# Altium PCB RepCounterPCB.PcbDoc
Units mil, origin at the board's own origin, x right, y up, seen from the top; angles counter-clockwise.
Board outline 3030 x 3255 mil, 2 copper layers (Top Layer, Bottom Layer); 23 components, 30 nets, 89 pads, 0 vias.
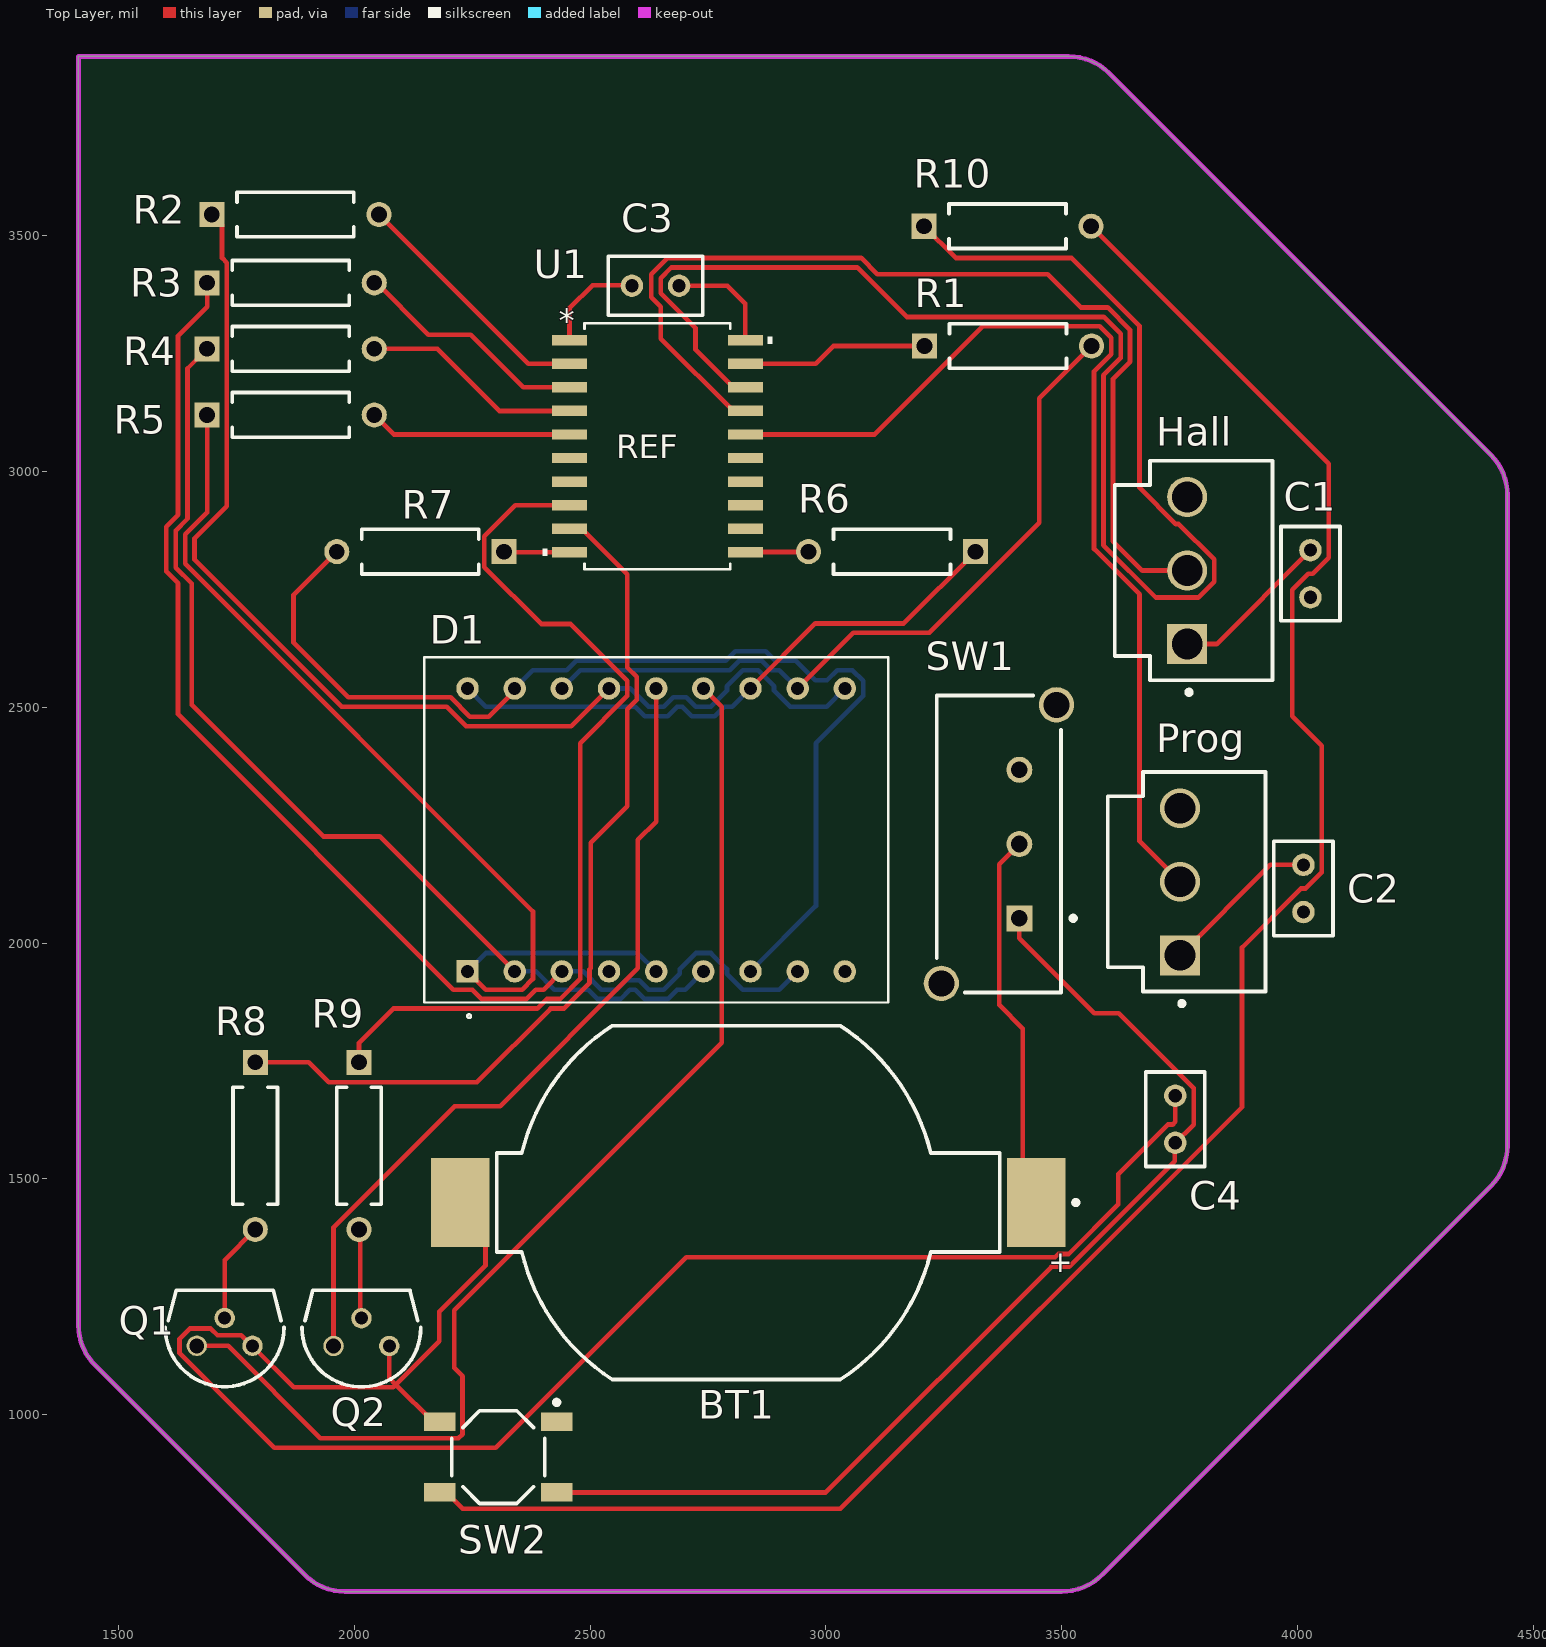
[diagram p0: Top Layer view]
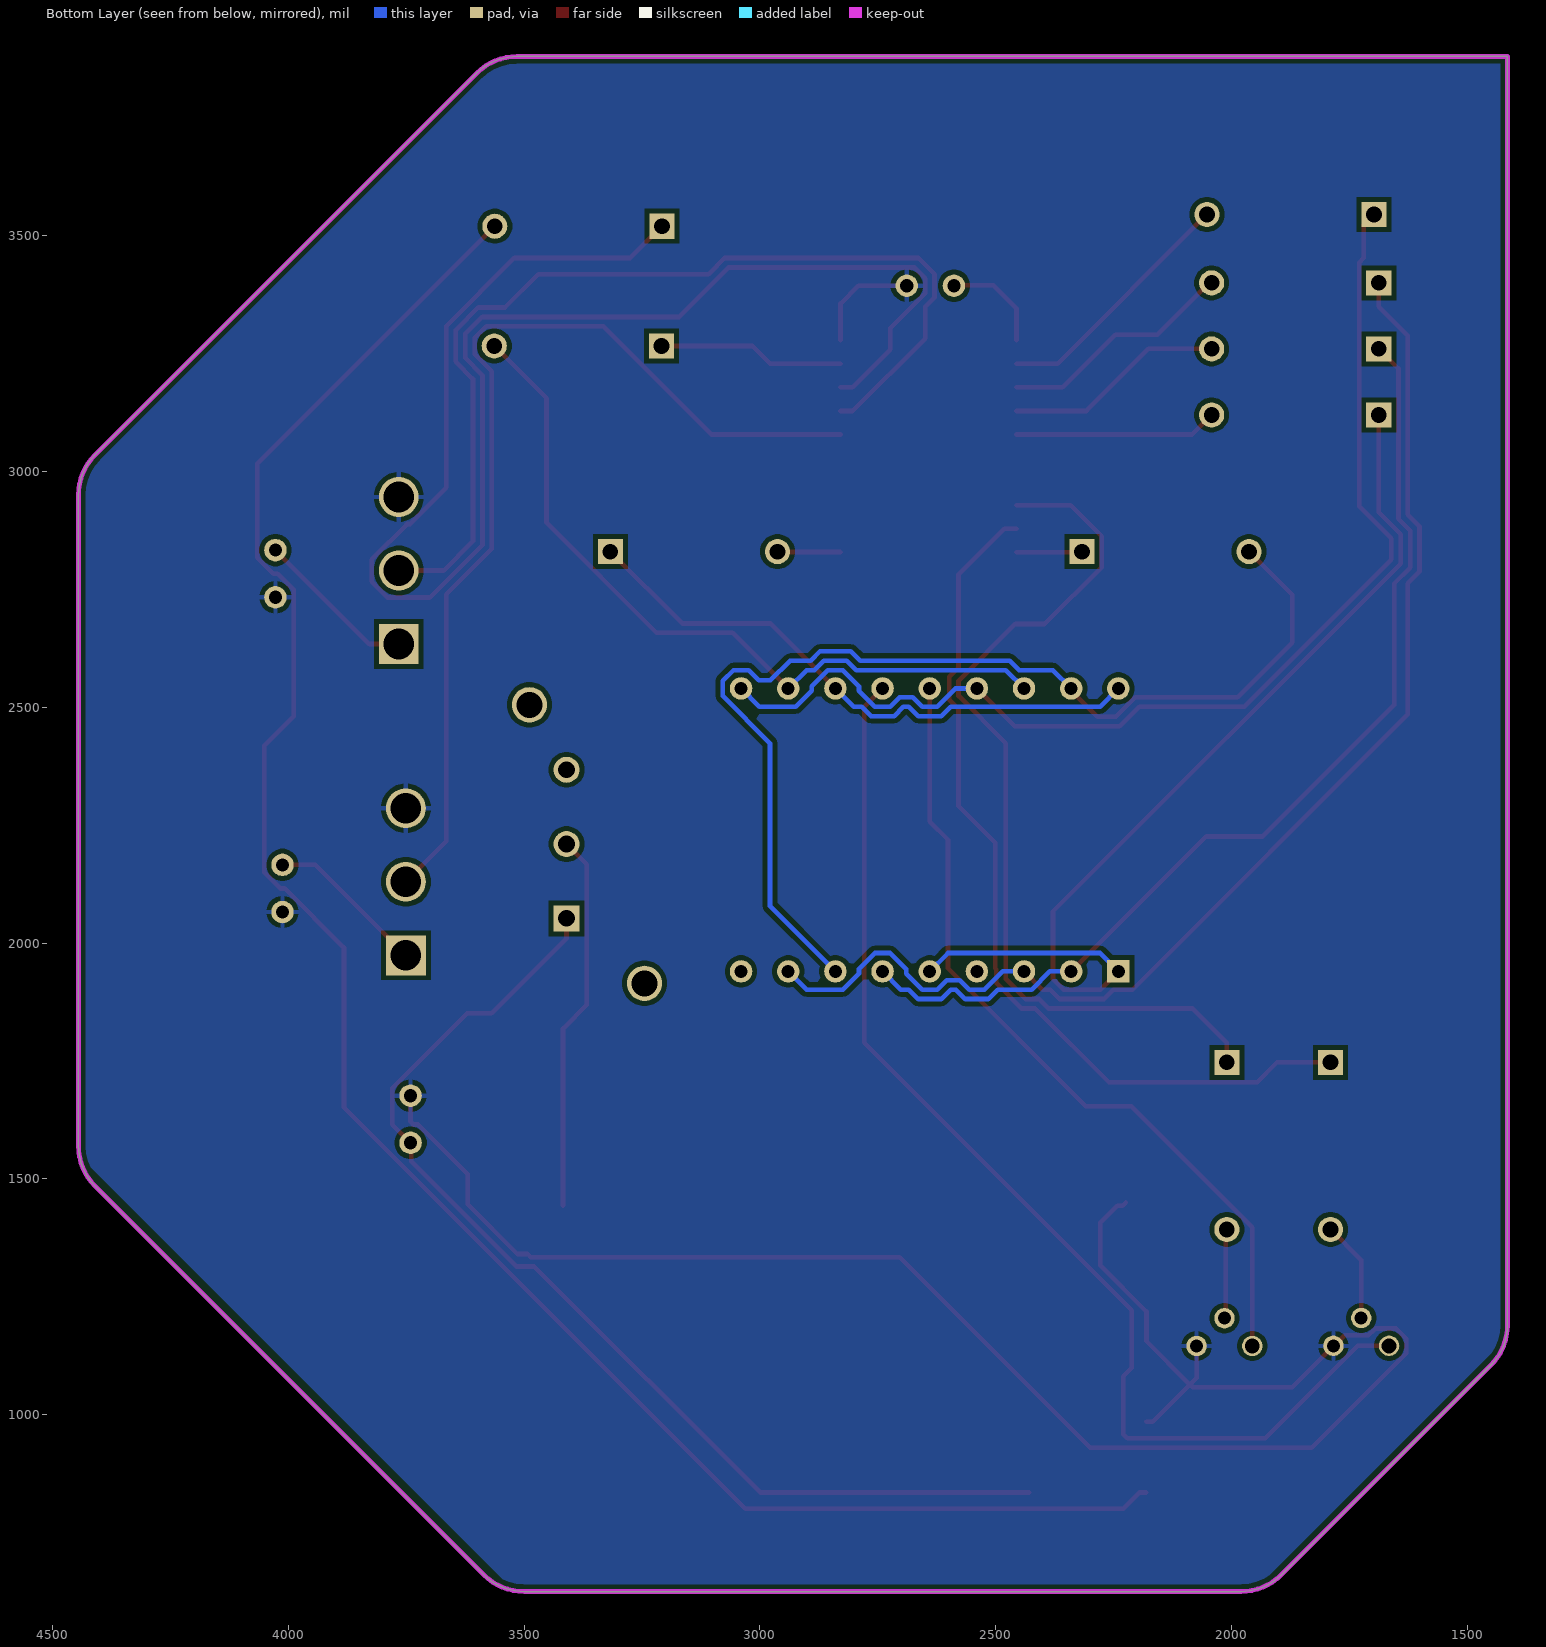
[diagram p1: Bottom Layer view, seen from below]

## Layer stack, top to bottom
Top Solder: solder mask 0.4, Solder Resist, Dk 3.5
Top Layer: signal copper 1.4
Dielectric 1: dielectric 12.6, FR-4, Dk 4.8
Bottom Layer: signal copper 1.4
Bottom Solder: solder mask 0.4, Solder Resist, Dk 3.5

## Board outline
1450.36,1104.64 1894.64,660.36 ccw(c1980,745.71) 1980,625 3500,625 ccw(c3500,745.71) 3585.36,660.36 4409.64,1484.64 ccw(c4324.29,1570) 4445,1570 4445,2950 ccw(c4324.29,2950) 4409.64,3035.36 3600.36,3844.64 ccw(c3515,3759.29) 3515,3880 1415,3880 1415,1190 ccw(c1535.71,1190)

## Design rules (kind name [scope] priority, off if disabled: settings)
Clearance [All] p1: gap=10 ignorepadtopadclearanceinfootprint=FALSE
PolygonConnect [All] p1: connectstyle=Relief reliefconductorwidth=10 reliefentries=4 polygonreliefangle="90 Angle" airgapwidth=10
RoutingVias [All] p1: holewidth=28 width=50 viastyle="Through Hole" minholewidth=28 minwidth=50 maxholewidth=28 maxwidth=50
SolderMaskExpansion [All] p1: expansion=4 istentingtop=FALSE
SupplyNets "Schematic Supply Nets" [InNet('GND')] p1: voltage=0.000
Width [All] p1: maxlimit=10 minlimit=10 preferedwidth=10
30 further rules are at their usual default settings.

## Components (designator, comment, footprint, x,y, rotation, side; value= is the part's Value field where it differs from the comment)
BT1 "796136-1" TECO-796136-1_V 2835.16,1449.82 r180 top
C1 "C320C104M5U5TA" C320C 4302.95,2507.62 r270 top
C2 "C320C104M5U5TA" C320C 4287.95,1840.21 r270 top
C3 "C320C104M5U5TA" C320C 2914.16,3669.47 r0 top
C4 "C320C104M5U5TA" C320C 4016.39,1350.88 r270 top
D1 "HDSP-523G" LED_HDSP-523G 2640,2240 r90 top
Hall "B3P-VH(LF)(SN)" JST-B3P-VH(LF)(SN)-3_V 3815,2790 r90 top
Prog "B3P-VH(LF)(SN)" JST-B3P-VH(LF)(SN)-3_V 3800,2130 r90 top (schematic designator Programmer)
Q1 "PN2222ABU" FAIR-TO-92 1725,1185.32 r180 top
Q2 "PN2222ABU" FAIR-TO-92 2015,1185 r180 top
R1 "MFR-25FBF52-475R" RESA60-630X240 3386.17,3266.16 r0 top value=475
R2 "MFR-25FBF52-475R" RESA60-630X240 1875,3545 r0 top value=475
R3 "MFR-25FBF52-475R" RESA60-630X240 1865,3400 r0 top value=475
R4 "MFR-25FBF52-475R" RESA60-630X240 1865,3260 r0 top value=475
R5 "MFR-25FBF52-475R" RESA60-630X240 1865,3120 r0 top value=475
R6 "MFR-25FBF52-475R" RESA60-630X240 3140,2830 r180 top value=475
R7 "MFR-25FBF52-475R" RESA60-630X240 2140,2830 r180 top value=475
R8 "MFR-25FBF52-1K" RESA60-630X240 1790,1570 r270 top value=1k
R9 "MFR-25FBF52-1K" RESA60-630X240 2010,1570 r270 top value=1k
R10 "MFR-25FBF52-475R" RESA60-630X240 3385,3520 r0 top value=475
SW1 "1825255-1" TECO-1825255-1_V 3366.69,2210 r90 top
SW2 "TL3342F160QG" ESWI-TL3342F160QG_V 2305,910 r270 top
U1 "ATTINY1616-SN" SOIC20_300MIL_MCH 2642.55,3053.44 r0 top

## Footprints (in the part's own frame and the unit in brackets; to place one, negate y for a bottom-side part, rotate by r counter-clockwise, add the part's x,y. Pads: shape width x height; smd on the part's side, far side on the other; paste and mask are expansions set on the pad)
C320C [mm]
  round 1.21 hole 0.71: 1(-8.27,-7) 2(-5.73,-7)
  silkscreen extent -9.54,-8.59 -4.46,-5.41, body extent -2.54,-1.59 2.54,1.59, height 6.34
ESWI-TL3342F160QG_V [mm] "SMD, 4-Leads, Body 5x5mm, Pitch 6.3mm"
  rect 1x1.7 smd: 1(-1.9,3.15) 2(-1.9,-3.15) 3(1.9,3.15) 4(1.9,-3.15)
  silkscreen extent -3.07,-2.5 2.5,3.28, body extent -2.5,-2.5 2.5,2.5, height 1.5
FAIR-TO-92 [mm] "TO, 3-Leads, Body Dia 4.79mm, Pitch 1.27mm"
  round 1.1 hole 0.7 paste-2539.97 mask+0.08: 1(-1.5,1)
  round 1.1 hole 0.7 mask+0.08: 2(0,-0.5)
  round 1.1 hole 0.8 mask+0.08: 3(1.5,1)
  silkscreen extent -3.2,-2 3.2,3.2, body extent -2.38,-2 2.38,2.5, height 0.25
JST-B3P-VH(LF)(SN)-3_V [mm] "Connector, 3-Leads, Body 8.5x11.82mm, Pitch 3.96mm"
  rect 2.15x2.15 hole 1.65: 1(-3.96,1.25)
  round 2.15 hole 1.65: 2(0,1.25) 3(3.96,1.25)
  silkscreen extent -6.68,-3.35 5.91,5.15, body extent -5.91,-3.35 5.91,5.15, height 10.9
LED_HDSP-523G [mm]
  rect 1.208x1.208 / inner round 1.208 / far side rect 1.208x1.208 hole 0.7: 1(-7.62,10.16)
  round 1.208 hole 0.7: 2(-7.62,7.62) 3(-7.62,5.08) 4(-7.62,2.54) 5(-7.62,0) 6(-7.62,-2.54) 7(-7.62,-5.08) 8(-7.62,-7.62) 9(-7.62,-10.16) 10(7.62,-10.16) 11(7.62,-7.62) 12(7.62,-5.08) 13(7.62,-2.54) 14(7.62,0) 15(7.62,2.54) 16(7.62,5.08) 17(7.62,7.62) 18(7.62,10.16)
  silkscreen extent -10.13,-12.5 9.3,12.5, body extent -9.3,-12.5 9.3,12.5, height 8
RESA60-630X240 [mm] "Axial Resistor, 2-Leads, Dia 2.4mm, Body Length 6.3mm"
  rect 1.35x1.35 hole 0.85: 1(-4.5,0)
  round 1.35 hole 0.85: 2(4.5,0)
  silkscreen extent -3.15,-1.2 3.15,1.2, body extent -4.77,-1.19 4.77,1.2, height 2.4
SOIC20_300MIL_MCH [mil]
  rect 74x22 smd paste+0 mask+0: 1(-186.5,225) 2(-186.5,175) 3(-186.5,125) 4(-186.5,75) 5(-186.5,25) 6(-186.5,-25) 7(-186.5,-75) 8(-186.5,-125) 9(-186.5,-175) 10(-186.5,-225) 11(186.5,-225) 12(186.5,-175) 13(186.5,-125) 14(186.5,-75) 15(186.5,-25) 16(186.5,25) 17(186.5,75) 18(186.5,125) 19(186.5,175) 20(186.5,225)
  silkscreen extent -244,-261 244,261, body extent -209,-256 209,256, height 104
TECO-796136-1_V [mm] "SMD, 2-Leads, Body 32.31x19.05mm"
  rect 3.15x4.78 smd: 1(-15.52,0) 2(15.52,0)
  silkscreen extent -17.77,-9.52 13.54,9.53, body extent -16.15,-9.52 16.17,9.53, height 6.52
TECO-1825255-1_V [mm] "THD, 5-Leads, Body 6.7x16mm, Pitch 4mm"
  rect 1.4x1.4 hole 0.9: 1(-4,-1.1)
  round 1.4 hole 0.9: 2(0,-1.1) 3(4,-1.1)
  round 1.9 hole 1.4: MH1(-7.5,3.1) MH2(7.5,-3.1)
  silkscreen extent -8,-4.13 8,3.35, body extent -8,-3.35 8,3.35, height 12

## Part data
BT1: library part CMP-002-00002-2, "Battery Connector, 1 Cell, CR2032, 2-Pin SMD, RoHS, Tape and Reel", Colour=Black, Manufacturer="TE Connectivity", Max Voltage Rating (AC)=30V, Package Description="2-Pin Surface Mount Device, Body 32.31 x 19.05 mm", Package Quantity=400, Batteries=1, Case/Package=796136-1, Connector Type=BatteryHolder, Contact Material=Bronze, Contact Plating=Tin, Datasheet URL=http://www.te.com/commerce/DocumentDelivery/DDEController?Action=srchrtrv&DocNm=796136&DocType=Customer+Drawing&DocLang=English&DocFormat=pdf&PartCntxt=796136-1, Datasheet Version=Dec-13, Manufacturer URL=http://www.te.com/, Mounting Technology=SM, Package Reference=796136-1, Packaging=TapeandReel, Pins=2, RoHS Compliant=True
C1 C2 C3 C4: "C320 C 100nF Ceramic Multilayer Capacitor, 50 VDC, +85degC, Z5U Dielec, +/-20%", Package="Radial KEMET", Check_prices=https://www.snapeda.com/parts/C320C104M5U5TA/KEMET/view-part/?ref=eda, MF=KEMET, MP=C320C104M5U5TA, SnapEDA_Link=https://www.snapeda.com/parts/C320C104M5U5TA/KEMET/view-part/?ref=snap
D1: "Displays Segmented Panel 2DIGIT 16LED Green CC 18-Pin DIP Tube", Package=None, Check_prices=https://www.snapeda.com/parts/HDSP-523G/Avago/view-part/?ref=eda, MF="Avago Technologies", MP=HDSP-523G, SnapEDA_Link=https://www.snapeda.com/parts/HDSP-523G/Avago/view-part/?ref=snap
Hall Prog: library part CMP-002-00026-2, "Male Header, Pitch 3.96 mm, 1 x 3 Position, Height 10.9 mm, Tail Length 3.7 mm, -25 to 85 degC, RoHS, Bulk", Manufacturer=JST, Max Operating Temperature=85°C, Min Operating Temperature=-25°C, Package Description="Male Header, Pitch 3.96 mm, 1 x 3 Position, Height 10.9 mm, Tail Length 3.7 mm", Case/Package=B3P-VH(LF)(SN), Connector Type=Header, Datasheet URL=http://www.jst-mfg.com/product/pdf/eng/eVH.pdf, Datasheet Version=May-16, Gender=Male, Manufacturer URL=http://www.jst.com/home2.html, Mounting Technology=TH, Package Reference=B3P-VH(LF)(SN), RoHS Compliant=Unknown
Q1 Q2: library part CMP-013-00009-7, "NPN General-Purpose Amplifier, 40 V, -55 to 150 degC, 3-Pin TO-92, RoHS, Bulk", Case/Package=TO-226-3, Frequency=300MHz, Manufacturer=Fairchild, Max Operating Temperature=150°C, Min Operating Temperature=-55°C, Package Description="3-Pin Transistor Outline Package, Body Dia 4.79 mm, Pitch 1.27 mm", Package Quantity=1000, Package Reference=TO-92, Power=625mW, Datasheet URL=https://www.fairchildsemi.com/datasheets/PN/PN2222A.pdf, Datasheet Version="Rev. 1.1.0, 07/2014", Elements=1, hFE Min=100, Mounting Technology=TH, Packaging=Bulk, Pins=3, RoHS Compliant=True, Vce Max=1V
R1 R2 R3 R4 R5 R6 R7 R10: library part CMP-009-00056-4, "Axial Resistor, 475 Ohm, +/- 1%, 0.25 W, -55 to 155 degC, 2-Pin THD, RoHS, Bulk", Case/Package=Axial, Manufacturer=Yageo, Max Operating Temperature=155°C, Min Operating Temperature=-55°C, Package Description="2-Pin Axial Lead, Dia 2.4 mm, Body Length 6.3 mm", Package Quantity=200, Package Reference=MFR-25, Power=250mW, Tolerance=1%, Voltage Rating=250V, Datasheet URL=http://www.yageo.com/documents/recent/Yageo%20LR_MFR_2013.pdf, Datasheet Version=Apr-13, Manufacturer URL=http://www.yageo.com/, Mounting Technology=TH, Packaging=Bulk, RoHS Compliant=True
R8 R9: library part CMP-009-00048-4, "Axial Resistor, 1 KOhm, +/- 1%, 250 mW, -55 to 155 degC, 2-Pin THD, RoHS, Bulk", Case/Package=Axial, Manufacturer=Yageo, Max Operating Temperature=155°C, Min Operating Temperature=-55°C, Package Description="2-Pin Axial Lead, Dia 2.4 mm, Body Length 6.3 mm", Package Quantity=200, Package Reference=MFR-25, Power=250mW, Tolerance=1%, Voltage Rating=250V, Composition=CarbonFilm, Datasheet URL=http://www.yageo.com/documents/recent/Yageo%20LR_MFR_2013.pdf, Datasheet Version=Apr-13, Manufacturer URL=http://www.yageo.com/, Mounting Technology=TH, Packaging=Bulk, RoHS Compliant=True
SW1: library part CMP-011-00001-2, "Slide Switch, SPDT, 0.3A, 125 V, -20 to 85 degC, 5-Pin THD, RoHS, Tray", Current Rating=300mA, Manufacturer="TE Connectivity", Max Contact Resistance=30mohm, Max Operating Temperature=85°C, Max Voltage Rating (AC)=125V, Min Operating Temperature=-20°C, Operating Force=600gf, Package Description="5-Pin Through Hole Device, Body 6.7 x 16 mm, Pitch 4 mm", Package Quantity=560, Case/Package=1825255-1, Contact Finish=Silver, Contact Material=Copper, Contact Plating=Silver, Datasheet URL=http://www.te.com/commerce/DocumentDelivery/DDEController?Action=showdoc&DocId=Customer+Drawing%7F1825255%7FA4%7Fpdf%7FEnglish%7FENG_CD_1825255_A4_baseFilename.pdf%7F1825255-1, Datasheet Version="Rev. A4, 03/2014", Manufacturer URL=http://www.te.com/, Max Current Rating=300mA, Mounting Technology=TH, Package Reference=1825255-1, Packaging=Bulk, RoHS Compliant=True, Throw Configuration=SPDT, Voltage Rating (AC)=125V
SW2: library part CMP-011-00008-2, "Tactile Switch, SPST-NO, 50 mA, 12 V, 4-Pin SMD, RoHS, Tape and Reel", Current Rating=50mA, Manufacturer=E-Switch, Max Voltage Rating (DC)=12V, Operating Force=1.6N, Package Description="4-Pin Surface Mount Device, Body 5 x 5 mm, Pitch 6.3 mm", Package Quantity=3000, Case/Package=TL3342F160QG, Contact Material=Silver, Contact Plating=Silver, Datasheet URL=http://spec_sheets.e-switch.com/specs/P010632.pdf, Datasheet Version="Rev. I, 12/2010", Manufacturer URL=http://www.e-switch.ch/en/, Mounting Technology=SM, Package Reference=TL3342F160QG, Packaging=TapeandReel, RoHS Compliant=True, Throw Configuration=SPST, Voltage Rating (DC)=12V
U1: "Description", Manufacturer_Name=Microchip, Copyright="Copyright (C) 2025 Ultra Librarian. All rights reserved.", Manufacturer_Part_Number=ATTINY1616-SN, RefDes=RefDes, Type=Type

## Nets (pads, with @x,y where several pads share a name; then routed paths per layer and width w, separated by ;. In a path a pad name is that pad's centre, name@x,y a point inside that pad or via, vN(x,y) a via of type N, cw(c..) or ccw(c..) an arc to the next point about the centre after c; other vN are vias at no path point)
GND: BT1.2 C1.2 C2.2 C3.2 C4.1 Hall.3 Prog.3 Q1.1 Q2.1 SW2.2 U1.20 | length 4066.4
  Top Layer w10: Q1.1@1784.06,1145.53 1871.63,1057.95 2082.34,1057.95 2088.2,1063.81 ; Q1.1 1782.09,1145.94 1759.69,1168.35 1709.82,1168.35 1695.57,1182.6 1650.76,1182.6 1629.29,1161.13 1629.29,1130.76 1829.94,930.12 2299.97,930.12 2703.91,1334.06 3485.67,1334.06 3492.34,1340.73 3514.4,1340.73 3619.56,1445.88 3619.56,1510.13 3724.72,1615.29 3734.94,1615.29 3740.8,1621.15 C4.1 ; Q2.1 2074.06,1077.95 2088.2,1063.81 ; SW2.2 2167.2,984.8 2088.2,1063.81 ; BT1.2 2230.8,1443.15 2241.85,1443.15 2278.27,1406.73 2278.27,1316.55 2180.3,1218.59 2180.3,1155.92 2088.2,1063.81 ; C3.2 2791.12,3393.88 2829.05,3355.95 U1.20
NetBT1_1: BT1.1 SW1.2 | length 805.2
  Top Layer w10: SW1.2 3367.44,2167.44 3367.44,1868.74 3417.45,1818.73 BT1.1@3417.45,1443.15
NetC1_1: C1.1 Hall.1 | length 344.1
  Top Layer w10: Hall.1 3828.25,2634.09 C1.1
NetC2_1: C2.1 Prog.1 | length 341
  Top Layer w10: Prog.1 3942.5,2165.8 C2.1
NetC3_1: C3.1 U1.1 | length 220.9
  Top Layer w10: U1.1 2456.05,3346.05 2505,3395 2587.45,3395 C3.1
NetC4_2: C4.2 SW1.1 SW2.3 | length 2316.7
  Top Layer w10: SW2.3 2999.52,835.2 3478.38,1314.06 3516.01,1314.06 3739.61,1537.65 3739.61,1575.28 3779.61,1615.29 3779.61,1692.55 3620.91,1851.26 3568.71,1851.26 3410,2009.96 SW1.1
NetD1_13: D1.13 Q1.3 | length 2487.7
  Top Layer w10: Q1.3 1732.22,1145.94 1928.05,950.12 2220.66,950.12 2229.45,958.9 2229.45,1081.38 2211.65,1099.18 2211.65,1221.65 2778.78,1788.78 2778.78,2501.22 D1.13
NetD1_14: D1.14 Q2.3 | length 1734.2
  Top Layer w10: Q2.3 1955.95,1397.58 2212.47,1654.1 2308.94,1654.1 2601.22,1946.38 2601.22,2218.72 2640,2257.5 D1.14
NetHall_2: Hall.2 U1.17 | length 2126.2
  Top Layer w10: U1.17 2803.05,3128.44 2649.75,3281.74 2649.75,3349.52 2629.75,3369.52 2629.75,3418.24 2664.21,3452.7 3074.42,3452.7 3108.87,3418.24 3470.05,3418.24 3540.56,3347.74 3597.12,3347.74 3644.91,3299.95 3644.91,3232.38 3608.46,3195.93 3608.46,2852.32 3670.79,2790 Hall.2
NetProgrammer_2: Prog.2 U1.16 | length 2124.9
  Top Layer w10: U1.16 3103.15,3078.44 3332.45,3307.74 3580.56,3307.74 3604.91,3283.39 3604.91,3248.94 3568.46,3212.5 3568.46,2835.75 3665,2739.22 3665,2215.79 Prog.2
NetQ1_2: Q1.2 R8.2 | length 214.8
  Top Layer w10: Q1.2 1725,1327.83 R8.2
NetQ2_2: Q2.2 R9.2 | length 190.2
  Top Layer w10: R9.2 2012.5,1390.33 2012.5,1207.19 Q2.2
NetR1_1: R1.1 U1.19 | length 395.6
  Top Layer w10: U1.19 2978.44,3228.44 3016.16,3266.16 R1.1
NetR2_2: R2.2 U1.2 | length 535
  Top Layer w10: R2.2 2368.72,3228.44 U1.2
NetR3_2: R3.2 U1.3 | length 507.7
  Top Layer w10: R3.2@2042.17,3405 2157.17,3290 2246.78,3290 2358.34,3178.44 U1.3
NetR4_2: R4.2 U1.4 | length 468.4
  Top Layer w10: R4.2 2176.17,3260 2307.73,3128.44 U1.4
NetR5_2: R5.2 U1.5 | length 431.1
  Top Layer w10: R5.2 2083.72,3078.44 U1.5
NetR6_2: R6.2 U1.11 | length 134.4
  Top Layer w10: U1.11 2829.83,2829.22 2962.05,2829.22 R6.2
NetR7_1: R7.1 U1.10 | length 139.5
  Top Layer w10: R7.1 2318.72,2828.44 U1.10
NetR8_1: R8.1 U1.9 | length 1892.1
  Top Layer w10: R8.1 1903.61,1747.17 1945.78,1705 2259.84,1705 2416.06,1861.22 2444.35,1861.22 2498.78,1915.65 2498.78,1943.94 2501.22,1946.38 2501.22,2212.44 2578.78,2290 2578.78,2495.65 2598.78,2515.65 2598.78,2564.35 2578.78,2584.35 2578.78,2781.71 2482.05,2878.44 U1.9
NetR9_1: R9.1 U1.8 | length 1916.2
  Top Layer w10: R9.1 2010,1788.74 2082.48,1861.22 2387.78,1861.22 2407.78,1881.22 2436.06,1881.22 2478.78,1923.94 2478.78,2423.94 2578.78,2523.94 2578.78,2556.06 2458.21,2676.64 2396.17,2676.64 2275.59,2797.21 2275.59,2862.79 2341.24,2928.44 U1.8
NetR10_1: R10.1 U1.18 | length 3277.4
  Top Layer w10: U1.18 2803.05,3178.44 2723.4,3258.09 2723.4,3304.15 2649.75,3377.8 2649.75,3409.96 2672.49,3432.7 3066.13,3432.7 3171.09,3327.74 3588.84,3327.74 3624.91,3291.67 3624.91,3240.66 3588.46,3204.21 3588.46,2844.04 3699.83,2732.68 3789.53,2732.68 3823.11,2766.26 3823.11,2813.74 3748.27,2888.58 3742.04,2888.58 3664.91,2965.72 3664.91,3308.24 3520.45,3452.7 3275.13,3452.7 R10.1
NetR10_2: R10.2 SW2.4 | length 4284.7
  Top Layer w10: SW2.4 2194.76,835.2 2229.45,800.51 3030.75,800.51 3882.17,1651.93 3882.17,1990.51 4007.46,2115.8 4017.26,2115.8 4051.18,2149.72 4051.18,2418.19 3988.54,2480.83 3988.54,2749.29 4022.46,2783.21 4032.26,2783.21 4066.18,2817.13 4066.18,3015.98 R10.2
SEG_A: D1.11 D1.16 R1.2 | length 1627.7
  Top Layer w10: D1.11 3057.81,2657.81 3219.33,2657.81 3452.52,2890.99 3452.52,3155.35 R1.2
  Bottom Layer w10: D1.16 2478.78,2578.78 2795.65,2578.78 2815.65,2598.78 2864.35,2598.78 2884.35,2578.78 2901.22,2578.78 D1.11
SEG_B: D1.10 D1.15 R2.1 | length 2455.8
  Top Layer w10: R2.1 1719.41,3523.43 1719.41,3452.82 1729.41,3442.82 1729.41,2926.38 1661.26,2858.23 1661.26,2812.78 1972.82,2501.22 2195.65,2501.22 2236.87,2460 2460,2460 D1.15
  Bottom Layer w10: D1.15 2585.16,2540 2623.94,2501.22 2656.06,2501.22 2676.06,2521.22 2703.94,2521.22 2723.94,2501.22 2756.06,2501.22 2790,2535.16 2790,2544.84 2823.94,2578.78 2856.06,2578.78 2890,2544.84 2890,2535.16 2923.94,2501.22 3001.22,2501.22 D1.10
SEG_C: D1.3 D1.8 R3.1 | length 2678.7
  Top Layer w10: R3.1@1687.83,3405 1687.83,3349.36 1626.2,3287.73 1626.2,2908.02 1601.26,2883.09 1601.26,2787.93 1626.2,2762.99 1626.2,2485.03 2210.01,1901.22 2250.5,1901.22 2270.5,1881.22 2364.35,1881.22 2384.35,1901.22 2401.22,1901.22 D1.3
  Bottom Layer w10: D1.3 2485.16,1940 2523.94,1901.22 2556.06,1901.22 2576.06,1921.22 2603.94,1921.22 2623.94,1901.22 2656.06,1901.22 2690,1935.16 2690,1944.84 2723.94,1978.78 2756.06,1978.78 2790,1944.84 2790,1935.16 2823.94,1901.22 2901.22,1901.22 D1.8
SEG_D: D1.2 D1.6 R4.1 | length 2180.8
  Top Layer w10: R4.1 1646.2,3218.36 1646.2,2899.74 1621.26,2874.8 1621.26,2796.21 1655,2762.47 1655,2505 1933.91,2226.09 2053.91,2226.09 D1.2
  Bottom Layer w10: D1.2 2385.16,1940 2423.94,1901.22 2495.65,1901.22 2515.65,1881.22 2564.35,1881.22 2584.35,1901.22 2595.65,1901.22 2615.65,1881.22 2664.35,1881.22 2684.35,1901.22 2701.22,1901.22 D1.6
SEG_E: D1.1 D1.5 R5.1 | length 2117.2
  Top Layer w10: R5.1 1687.83,2913.09 1641.26,2866.52 1641.26,2804.49 2378.78,2066.98 2378.78,1923.94 2356.06,1901.22 2278.78,1901.22 D1.1
  Bottom Layer w10: D1.1 2278.78,1978.78 2601.22,1978.78 D1.5
SEG_F: D1.12 D1.18 R6.1 | length 1262.6
  Top Layer w10: D1.12 2977.81,2677.81 3164.97,2677.81 R6.1
  Bottom Layer w10: D1.18 2278.78,2501.22 2595.65,2501.22 2615.65,2481.22 2664.35,2481.22 2684.35,2501.22 2695.65,2501.22 2715.65,2481.22 2764.35,2481.22 2784.35,2501.22 2801.22,2501.22 D1.12
SEG_G: D1.7 D1.17 R7.2 | length 2323
  Top Layer w10: R7.2 1871.16,2738.33 1871.16,2637.02 1986.96,2521.22 2203.94,2521.22 2245.16,2480 2285,2480 2340,2535 D1.17
  Bottom Layer w10: D1.17 2378.78,2578.78 2450.5,2578.78 2470.5,2598.78 2787.37,2598.78 2807.37,2618.78 2872.63,2618.78 2892.63,2598.78 2936.06,2598.78 2977.78,2557.06 3002.22,2557.06 3023.94,2578.78 3056.06,2578.78 3078.78,2556.06 3078.78,2523.94 2978.78,2423.94 2978.78,2078.78 D1.7
pads on no net: D1.4 D1.9 SW1.3 SW1.MH1 SW1.MH2 SW2.1 U1.6 U1.7 U1.12 U1.13 U1.14 U1.15

## Polygon pours and split planes (outlines as drawn)
GND on Bottom Layer "GND_L02_P000" (solid, remove dead copper, pour order 0): 1425,3865 3570.22,3865 4439.8,2995.41 4439.8,1534.96 4429.96,1534.96 3526.92,631.92 1939.28,631.92 1939.28,639.83 1415,1164.11 1415,3866.09

## Keep-outs
Keep-Out Layer:
  the board outline again, w10

## Text inside footprints (layer, text, board x,y; h text height)
BT1: Top Overlay "+" at 3522.99,1341.63 h45.28 r180
U1: Top Overlay "REF" at 2555.05,3028.44 h50; Top Overlay "*" at 2433.55,3295.44 h50; Mechanical 13 "RefDes2" at 2525,2940 h50; Mechanical 13 "*" at 2495.55,3256.35 h50